# Altium PCB version_3.PcbDoc
Units mil, origin at the board's own origin, x right, y up, seen from the top; angles counter-clockwise.
Board outline 3930.36 x 3820 mil, 2 copper layers (Top Layer, Bottom Layer); 69 components, 63 nets, 309 pads, 68 vias.
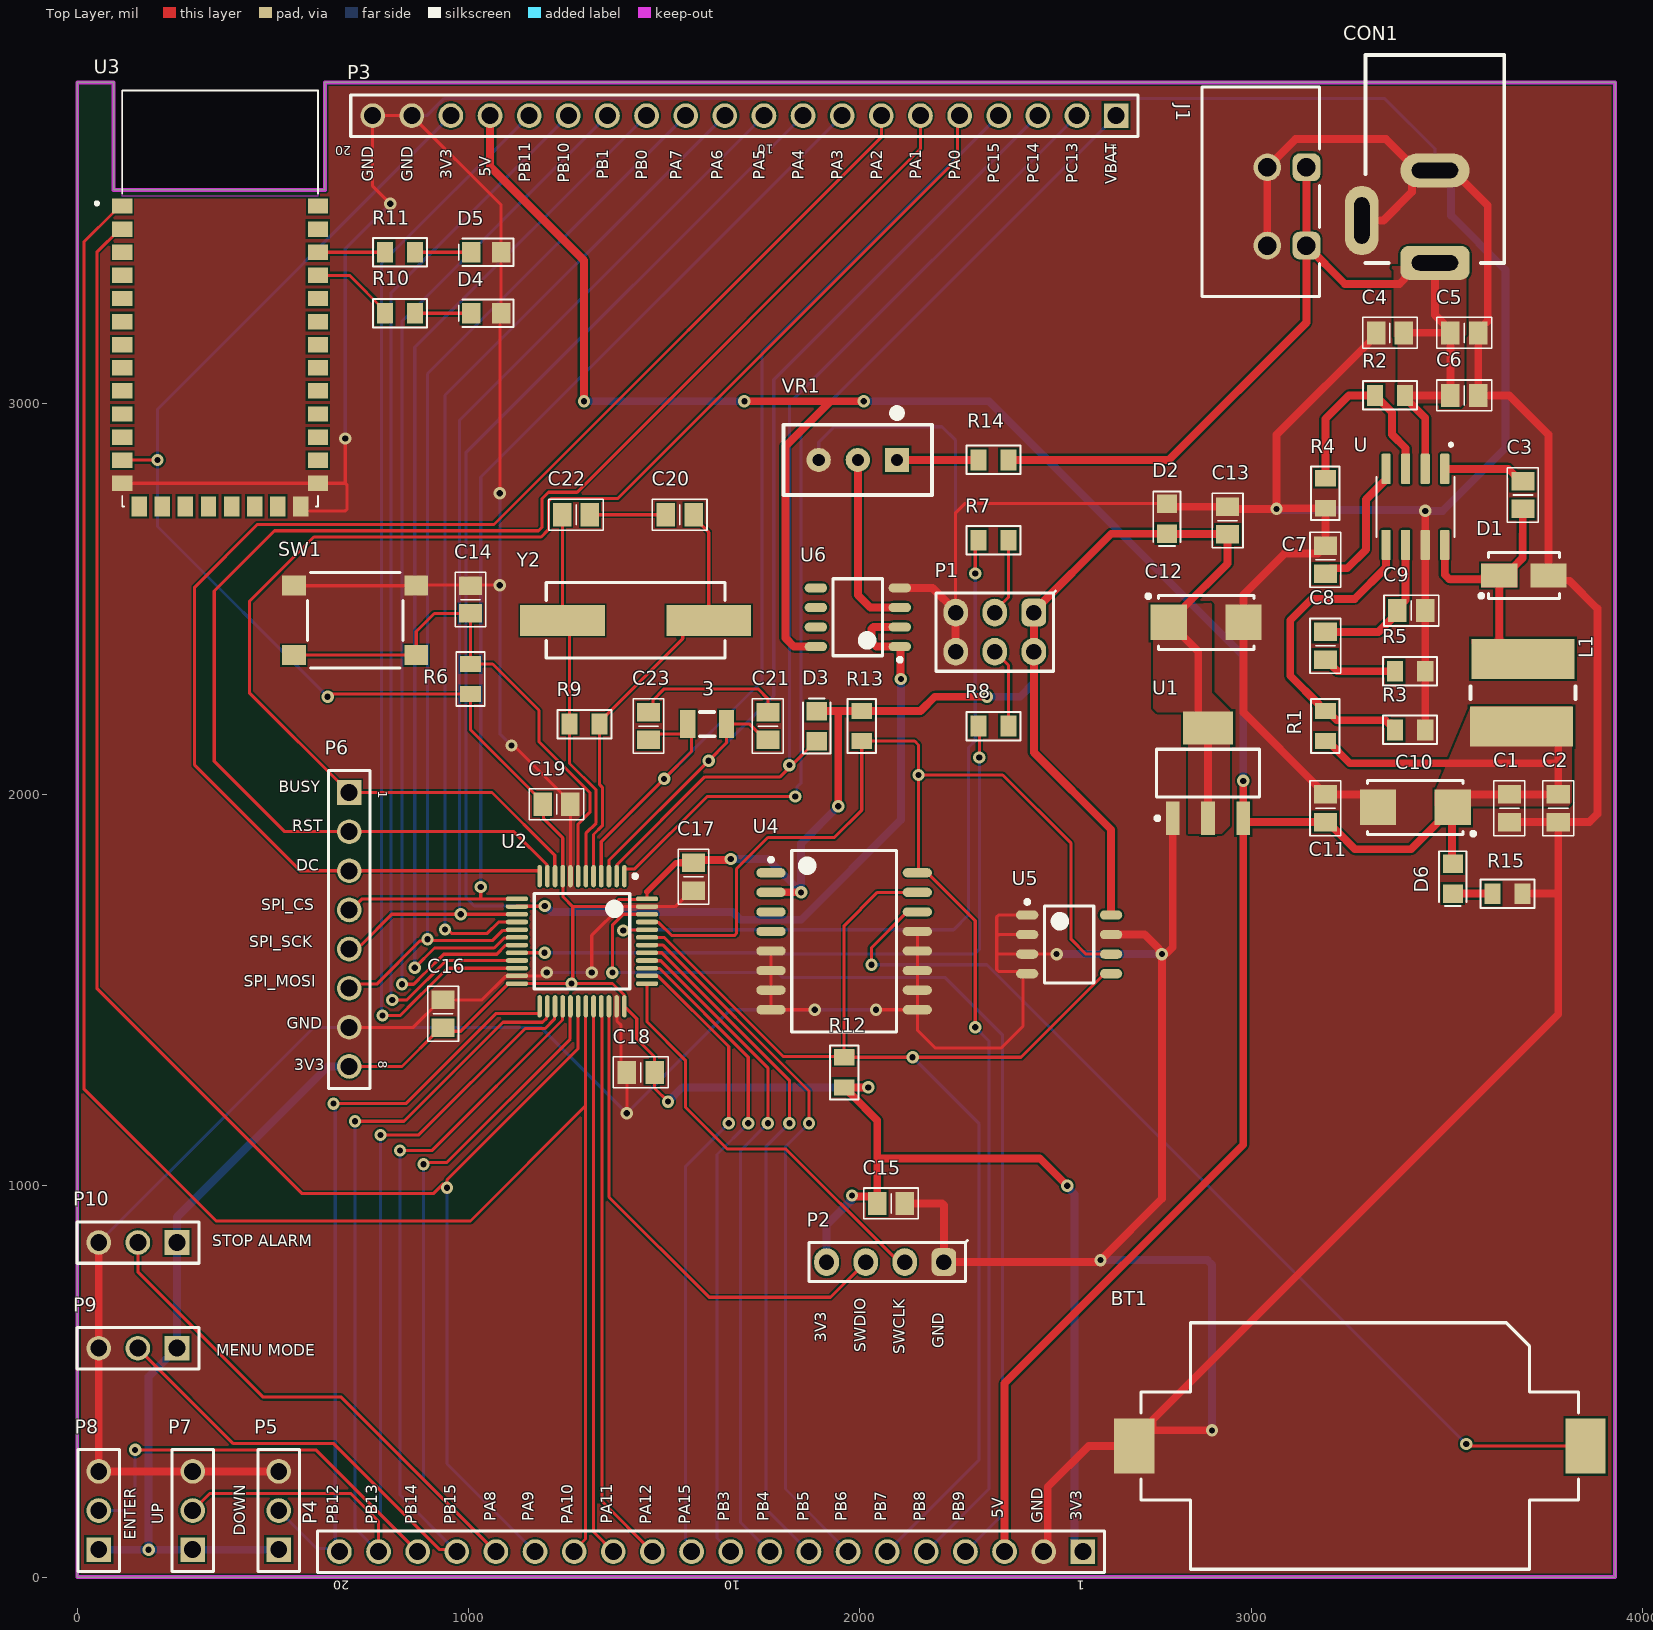
[diagram p0: Top Layer view]
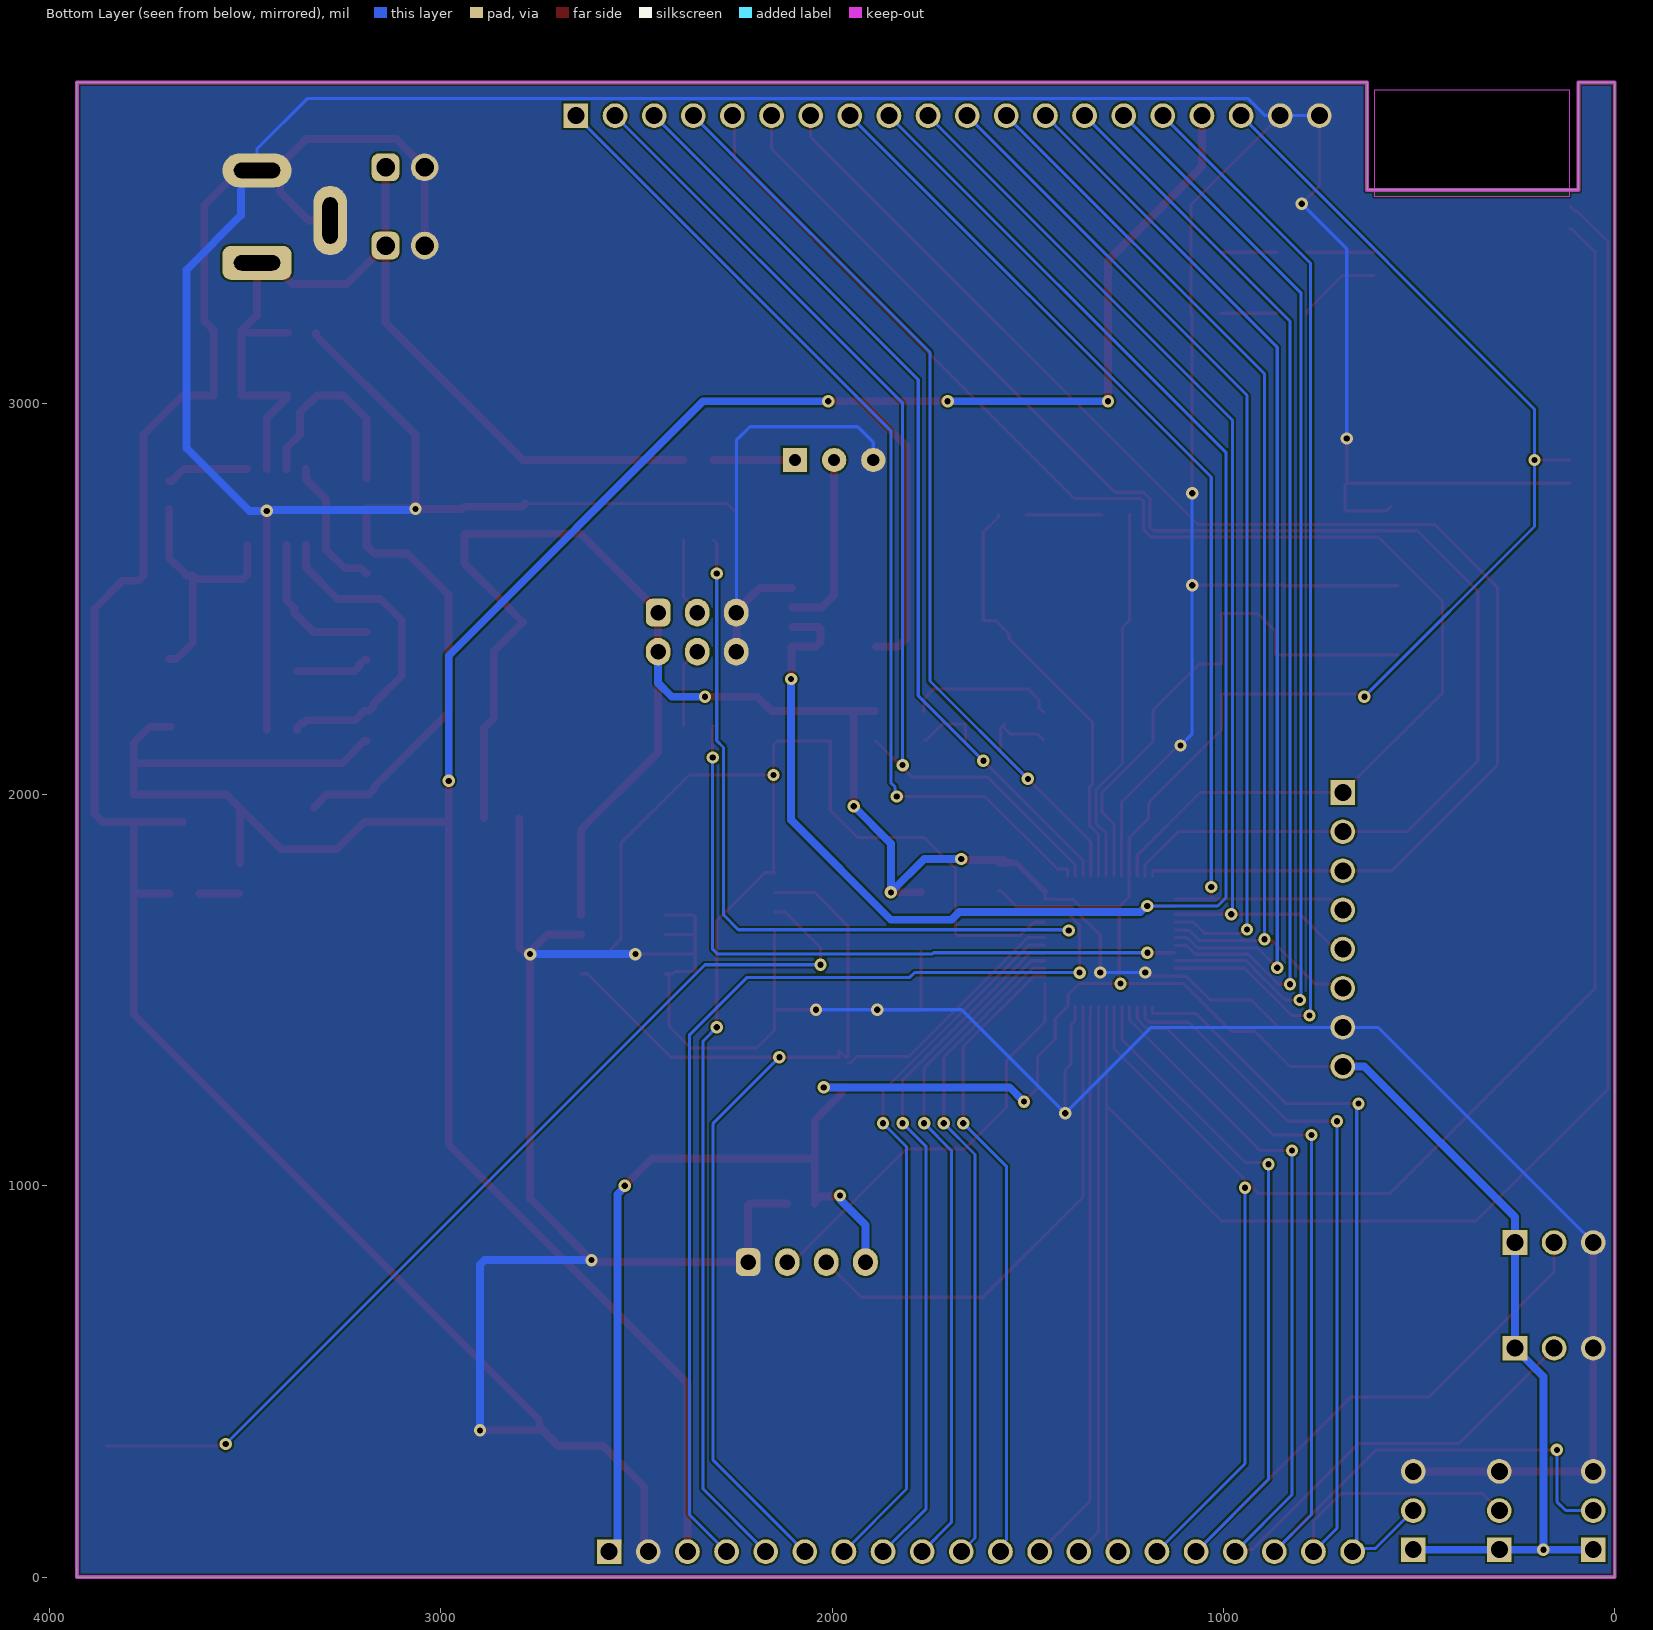
[diagram p1: Bottom Layer view, seen from below]

## Layer stack, top to bottom
Top Solder: solder mask 0.4, Solder Resist, Dk 3.5
Top Layer: signal copper 1.4
Dielectric 1: dielectric 12.6, FR-4, Dk 4.8
Bottom Layer: signal copper 1.4
Bottom Solder: solder mask 0.4, Solder Resist, Dk 3.5

## Board outline
0,0 0,3820 92.86,3820 92.86,3545 632.86,3545 632.86,3820 3930.36,3820 3930.36,0

## Design rules (kind name [scope] priority, off if disabled: settings)
Clearance [All] p1: gap=5 ignorepadtopadclearanceinfootprint=FALSE
PolygonConnect [All] p1: connectstyle=Direct reliefconductorwidth=10 reliefentries=4 polygonreliefangle="90 Angle" airgapwidth=10
RoutingVias [All] p1: holewidth=15.75 width=31.5 viastyle="Through Hole" minholewidth=15.75 minwidth=31.5 maxholewidth=15.75 maxwidth=31.5
SolderMaskExpansion [All] p1: expansion=4 istentingtop=FALSE
Width [All] p1: maxlimit=50 minlimit=8 preferedwidth=10
30 further rules are at their usual default settings.

## Classes and differential pairs
component class 08_ADC_measure: R14 U6 VR1
component class 07_E_ink_display_Button_control: P5 P6 P7 P8 P9 P10
component class 06_I2C_DS3231: BT1 R12 R13 U4 U5
component class 05_Uart_Bluetooth: D4 D5 R10 R11 U3
component class 04_MCU: 3 C14 C15 C16 C17 C18 C19 C20 C21 C22 C23 D2 D3 P1 P2 P3 P4 R6 R7 R8 R9 SW1 U2 Y2
component class 03_Power_Spply: C1 C2 C3 C4 C5 C6 C7 C8 C9 C10 C11 C12 C13 CON1 D1 D6 J1 L1 R1 R2 R3 R4 R5 R15 U U1

## Components (designator, comment, footprint, x,y, rotation, side; value= is the part's Value field where it differs from the comment)
3 "32.768kHz" XKXGI-SUA-32.768K 1610,2180 r0 top
BT1 "79527141" 79527141 3278.23,335 r0 top
C1 "47uF" "C 0805" 3660,1965 r90 top
C2 "47uF" "C 0805" 3785,1965 r90 top
C3 "0.1uF" "C 0805" 3694.52,2765.43 r90 top
C4 "10uf" "C 0805" 3355,3180 r0 top
C5 "10uf" "C 0805" 3545,3180 r180 top
C6 "0.01uF" "C 0805" 3545,3020 r180 top
C7 "0.01uF" "C 0805" 3190,2600 r270 top
C8 "1000pF" "C 0805" 3190,2380 r90 top
C9 "47pF" "C 0805" 3409.57,2470 r180 top
C10 "22uF" "C SMD TAN 2312 (C)" 3420,1966.97 r180 top
C11 "100nF" "C 0805" 3190,1965 r270 top
C12 "22uF" "C SMD TAN 2312 (C)" 2885,2440 r0 top
C13 "100nF" "C 0805" 2940,2700 r270 top
C14 "C" "C 0805" 1005,2498.15 r90 top
C15 "104" "C 0805" 2080,955 r0 top
C16 "104" "C 0805" 935,1439.57 r270 top
C17 "104" "C 0805" 1575,1790 r90 top
C18 "104" "C 0805" 1440,1290 r0 top
C19 "104" "C 0805" 1225,1975 r180 top
C20 "20p" "C 0805" 1539.57,2715 r180 top
C21 "20p" "C 0805" 1765,2175 r90 top
C22 "20p" "C 0805" 1275,2715 r0 top
C23 "20p" "C 0805" 1460,2175 r90 top
CON1 "CON DC PWR" CONN/DC/PWR/5.0MM 3470,3358.78 r270 top
D1 "SS54F" "DO-214AC (SMA)" 3697.24,2560 r180 top
D2 "Led" "Led 0805" 2785,2705 r90 top
D3 "Led" "Led 0805" 1890,2175 r270 top
D4 "Led" "Led 0805" 1045,3230 r0 top
D5 "Led" "Led 0805" 1045,3385.91 r0 top
D6 "Led" "Led 0805" 3515.47,1785 r90 top
J1 "6A, 150V" 691402910002B 3025,3540 r180 top
L1 "10uh" "Inductor SMD CDRH3D67" 3695,2260 r270 top
P1 "Header 3X2" HDR/Header/6/DL 2345,2415 r180 top
P2 "Header 4" HDR/Header/4 2065,805 r180 top
P3 "3A, 250 V (AC)" 61302011121 1705,3735 r180 top
P4 "3A, 250 V (AC)" 61302011121 1620,65 r180 top
P5 "3A, 250 V (AC)" 61300311121 515,170 r90 top
P6 "3A, 250 V (AC)" 61300811121 695,1655 r270 top
P7 "3A, 250 V (AC)" 61300311121 295,170 r90 top
P8 "3A, 250 V (AC)" 61300311121 55,170 r90 top
P9 "3A, 250 V (AC)" 61300311121 155,585 r180 top
P10 "3A, 250 V (AC)" 61300311121 155,855 r180 top
R1 "8.2k" "R 0805" 3190,2175 r270 top
R2 "100k" "R 0805" 3355,3020 r0 top
R3 "1.6k" "R 0805" 3406.61,2165 r180 top
R4 "20k" "R 0805" 3190,2770 r90 top
R5 "30k" "R 0805" 3406.61,2315 r180 top
R6 "10k" "R 0805" 1005,2295 r90 top
R7 "100k" "R 0805" 2341.61,2650 r180 top
R8 "100k" "R 0805" 2341.61,2175 r0 top
R9 "R" "R 0805" 1296.61,2180 r0 top
R10 "470" "R 0805" 825,3230 r180 top
R11 "470" "R 0805" 825,3385.91 r180 top
R12 "10k" "R 0805" 1960,1290 r90 top
R13 "4.7k" "R 0805" 2005,2175 r270 top
R14 "100k" "R 0805" 2341.61,2855 r0 top
R15 "1.6k" "R 0805" 3655,1746.61 r180 top
SW1 "430152043826" WS-TASV_L6W6H4.3_4301x20438x6 710,2445 r0 top
U "TPS54231D" SOIC127P599X175-8N 3420,2735 r270 top
U1 "AMS1117-3.3V, 1A" "AMS1117-3.3V SOT223" 2890,2054.65 r90 top
U2 "STM32F103C8T6" STM32F103C8T6 1290,1625 r270 top
U3 "HC-05" XCVR_HC-05 365,3255 r0 top
U4 "DS3231SN" DS3231SN-16SOIC 1960,1625 r0 top
U5 "AT24C512C-SSHD-T" M24M01-RMN6TP 2535,1617.03 r0 top
U6 "LM358DR" LM358DR 1995,2452.97 r180 top
VR1 "VR" "R VAR E" 2095,2855 r180 top
Y2 "8MHz" WE-XTAL_HC49/4HSMX 1427.01,2445 r0 top

## Footprints (in the part's own frame and the unit in brackets; to place one, negate y for a bottom-side part, rotate by r counter-clockwise, add the part's x,y. Pads: shape width x height; smd on the part's side, far side on the other; paste and mask are expansions set on the pad)
79527141 [mm] "Battery Holder"
  rect 2.6x3.6 smd: 1(14.65,0) 2(-14.65,0)
  silkscreen extent -14.2,-8 14.2,8, body extent -15.95,-8 15.95,8, height 5.66
61300311121 [mm] "Pin Header, pitch 2.54 mm, THT, Vertical, single row, 3p"
  rect 1.6x1.6 hole 1.1: 1(-2.54,0)
  round 1.6 hole 1.1: 2(0,0) 3(2.54,0)
  silkscreen extent -3.96,-1.35 3.96,1.35, body extent -3.81,-1.27 3.81,1.27, height 8.57
61300811121 [mm] "Pin Header, pitch 2.54 mm, THT, Vertical, single row, 8p"
  rect 1.6x1.6 hole 1.1: 1(-8.89,0)
  round 1.6 hole 1.1: 2(-6.35,0) 3(-3.81,0) 4(-1.27,0) 5(1.27,0) 6(3.81,0) 7(6.35,0) 8(8.89,0)
  silkscreen extent -10.31,-1.35 10.31,1.35, body extent -10.16,-1.27 10.16,1.27, height 8.57
61302011121 [mm] "Pin Header, pitch 2.54 mm, THT, Vertical, single row, 20p"
  rect 1.6x1.6 hole 1.1: 1(-24.13,0)
  round 1.6 hole 1.1: 2(-21.59,0) 3(-19.05,0) 4(-16.51,0) 5(-13.97,0) 6(-11.43,0) 7(-8.89,0) 8(-6.35,0) 9(-3.81,0) 10(-1.27,0) 11(1.27,0) 12(3.81,0) 13(6.35,0) 14(8.89,0) 15(11.43,0) 16(13.97,0) 17(16.51,0) 18(19.05,0) 19(21.59,0) 20(24.13,0)
  silkscreen extent -25.55,-1.35 25.55,1.35, body extent -25.4,-1.27 25.4,1.27, height 8.57
691402910002B [mm] "2.54 mm - Screwless Horizontal Entry - 02p"
  rrect50% 1.8x1.8 hole 1.2: 1(-2.96,3.48) 1(-2.96,-1.6)
  round 1.8 hole 1.2: 2(-0.42,3.48) 2(-0.42,-1.6)
  silkscreen extent -3.81,-6.8 3.81,6.8, body extent -3.81,-6.8 3.81,6.8, height 12.64
"AMS1117-3.3V SOT223" [mm] "SOT223, 4-Leads, Body 6.51x7.00mm, Pitch 2.29mm"
  rect 2.15x0.9 smd: 1(-2.93,2.29) 2(-2.93,0) 3(-2.93,-2.29)
  rect 2.15x3.25 smd: 4(2.93,0)
  silkscreen extent -3.05,-3.35 1.55,3.41, body extent -3.5,-3.35 3.5,3.35, height 1.8
"C 0805" [mm] "Chip Capacitor, 2-Leads, Body 2.0x1.3mm, IPC Medium Density"
  rect 1.2x1.5 smd: 1(-0.9,0) 2(0.9,0)
  silkscreen extent -1.78,-1 1.78,1, body extent -1,-0.64 1,0.61, height 0.6
"C SMD TAN 2312 (C)" [mm] "Molded Capacitor, 2-Leads, Body 6.0x3.2mm, IPC Medium Density"
  rect 2.35x2.3 smd: 1(-2.425,0) 2(2.425,0)
  silkscreen extent -3.88,-1.75 3.1,1.82, body extent -3.09,-1.58 3.09,1.63, height 2.68
CONN/DC/PWR/5.0MM [mm]
  rrect50% 2.2x4.5 hole 1 slot 3 at 90 deg: 1(0,0)
  oval 2.2x4.5 hole 1 slot 3 at 90 deg: 2(-6,0)
  oval 4.5x2.2 hole 1 slot 3 at 0 deg: 3(-2.75,-4.75)
  silkscreen extent -13.5,-4.5 0,4.5, body extent -13.58,-5 0.25,4.5, height 11.02
"DO-214AC (SMA)" [mm] "Molded Diode, 2-Leads, Body 4.3x2.7mm, IPC Medium Density"
  rect 2.35x1.55 smd: 1(-1.6,0) 2(1.6,0)
  silkscreen extent -2.3,-1.5 2.89,1.5, body extent -2.6,-1.3 2.6,1.3, height 2.4
DS3231SN-16SOIC [mm] "SOIC, 16-Leads, Body 11.55x7.50mm, Pitch 1.27mm, IPC Medium Density"
  oval 1.9x0.6 smd: 1(-4.75,4.445) 2(-4.75,3.175) 3(-4.75,1.905) 4(-4.75,0.635) 5(-4.75,-0.635) 6(-4.75,-1.905) 7(-4.75,-3.175) 8(-4.75,-4.445) 9(4.75,-4.445) 10(4.75,-3.175) 11(4.75,-1.905) 12(4.75,-0.635) 13(4.75,0.635) 14(4.75,1.905) 15(4.75,3.175) 16(4.75,4.445)
  silkscreen extent -4.87,-5.9 3.4,5.9, body extent -5.16,-5.9 5.16,5.9, height 2.65
HDR/Header/4 [mm]
  rrect50% 1.6x1.8 hole 1: 1(-3.81,0)
  oval 1.6x1.8 hole 1: 2(-1.27,0) 3(1.27,0) 4(3.81,0)
  silkscreen extent -5.33,-1.4 4.95,1.27, body extent -5.08,-1.27 5.08,1.27, height 8.89
HDR/Header/6/DL [mm]
  rrect50% 1.6x1.8 hole 1: 1(-2.54,-1.27)
  oval 1.6x1.8 hole 1: 2(-2.54,1.27) 3(0,-1.27) 4(0,1.27) 5(2.54,-1.27) 6(2.54,1.27)
  silkscreen extent -3.94,-2.67 3.81,2.54, body extent -3.81,-2.54 3.81,2.54, height 8.89
"Inductor SMD CDRH3D67" [mm] "Precision Wire Wound Inductor, 2-Leads, Body 10.0x8.0mm, IPC Low Density"
  rect 2.6x6.7 smd: 1(-2.2,0) 2(2.2,-0.1)
  silkscreen extent -0.4,-3.4 0.4,3.4, body extent -3.35,-3.35 3.35,3.35, height 2.9
"Led 0805" [mm] "Led SMD 0805"
  rect 1.2x1.3 smd: 1(-0.975,0) 2(0.975,0)
  silkscreen extent -1.78,-0.89 1.78,0.89, body extent -1.01,-0.64 1.01,0.61, height 1.1
LM358DR [mm] "SOIC, 8-Leads, Body 4.90x3.90mm, Pitch 1.27mm, IPC Medium Density"
  oval 1.45x0.6 smd: 1(-2.725,1.905) 2(-2.725,0.635) 3(-2.725,-0.635) 4(-2.725,-1.905) 5(2.725,-1.905) 6(2.725,-0.635) 7(2.725,0.635) 8(2.725,1.905)
  silkscreen extent -2.85,-2.5 1.6,2.88, body extent -3,-2.5 3,2.5, height 1.75
M24M01-RMN6TP [mm] "SOIC, 8-Leads, Body 4.90x3.90mm, Pitch 1.27mm, IPC Medium Density"
  oval 1.45x0.6 smd: 1(-2.725,1.905) 2(-2.725,0.635) 3(-2.725,-0.635) 4(-2.725,-1.905) 5(2.725,-1.905) 6(2.725,-0.635) 7(2.725,0.635) 8(2.725,1.905)
  silkscreen extent -2.85,-2.5 1.6,2.88, body extent -3,-2.5 3,2.5, height 1.25
"R 0805" [mm] "Chip Resistor, 2-Leads, Body 2.0x1.3mm, IPC Medium Density"
  rect 1.05x1.35 smd: 1(-0.975,0) 2(0.975,0)
  silkscreen extent -1.75,-0.92 1.75,0.92, body extent -1,-0.61 1,0.59, height 0.5
"R VAR E" [mil]
  rect 62x62 hole 31: 1(0,0)
  round 62 hole 31: 2(100,0) 3(200,0)
  silkscreen extent -90,-130 290,90, body extent -93,-97 293,97, height 459
SOIC127P599X175-8N [mm]
  rrect25% 1.97x0.6 smd: 1(-2.47,1.905) 2(-2.47,0.635) 3(-2.47,-0.635) 4(-2.47,-1.905) 5(2.47,-1.905) 6(2.47,-0.635) 7(2.47,0.635) 8(2.47,1.905)
  silkscreen extent -4.14,-2.52 1.95,2.52
STM32F103C8T6 [mm] "TSQFP, 48-Leads, Body 7.00x7.00mm, Pitch 0.50mm, IPC Medium Density"
  oval 1.45x0.3 smd: 1(-4.225,2.75) 2(-4.225,2.25) 3(-4.225,1.75) 4(-4.225,1.25) 5(-4.225,0.75) 6(-4.225,0.25) 7(-4.225,-0.25) 8(-4.225,-0.75) 9(-4.225,-1.25) 10(-4.225,-1.75) 11(-4.225,-2.25) 12(-4.225,-2.75) 25(4.225,-2.75) 26(4.225,-2.25) 27(4.225,-1.75) 28(4.225,-1.25) 29(4.225,-0.75) 30(4.225,-0.25) 31(4.225,0.25) 32(4.225,0.75) 33(4.225,1.25) 34(4.225,1.75) 35(4.225,2.25) 36(4.225,2.75)
  oval 0.3x1.45 smd: 13(-2.75,-4.225) 14(-2.25,-4.225) 15(-1.75,-4.225) 16(-1.25,-4.225) 17(-0.75,-4.225) 18(-0.25,-4.225) 19(0.25,-4.225) 20(0.75,-4.225) 21(1.25,-4.225) 22(1.75,-4.225) 23(2.25,-4.225) 24(2.75,-4.225) 37(2.75,4.225) 38(2.25,4.225) 39(1.75,4.225) 40(1.25,4.225) 41(0.75,4.225) 42(0.25,4.225) 43(-0.25,4.225) 44(-0.75,4.225) 45(-1.25,4.225) 46(-1.75,4.225) 47(-2.25,4.225) 48(-2.75,4.225)
  silkscreen extent -4.35,-3.1 3.1,3.58, body extent -4.5,-4.5 4.5,4.5, height 1.6
WE-XTAL_HC49/4HSMX [mm] "Quartz Crystal, size HC49/4HSMX, body 11.4x4.9mm"
  rect 5.5x2 smd: 1(-4.75,0) 2(4.75,0)
  silkscreen extent -5.8,-2.45 5.8,2.45, body extent -6.7,-2.45 6.7,2.45, height 4.3
WS-TASV_L6W6H4.3_4301x20438x6 [mm] "SMD Tact Switch, body 6x6mm"
  rect 1.55x1.3 smd: A1(-3.975,2.25) A2(3.975,2.25) B1(-3.975,-2.25) B2(3.975,-2.25)
  silkscreen extent -3.1,-3.1 3.1,3.1, body extent -4.5,-3.1 4.5,3.1, height 4.3
XCVR_HC-05 [mm]
  rect 1.3x1 smd: 1(-6.35,6.325) 2(-6.35,4.825) 3(-6.35,3.325) 4(-6.35,1.825) 5(-6.35,0.325) 6(-6.35,-1.175) 7(-6.35,-2.675) 8(-6.35,-4.175) 9(-6.35,-5.675) 10(-6.35,-7.175) 11(-6.35,-8.675) 12(-6.35,-10.175) 13(-6.35,-11.675) 22(6.35,-11.675) 23(6.35,-10.175) 24(6.35,-8.675) 25(6.35,-7.175) 26(6.35,-5.675) 27(6.35,-4.175) 28(6.35,-2.675) 29(6.35,-1.175) 30(6.35,0.325) 31(6.35,1.825) 32(6.35,3.325) 33(6.35,4.825) 34(6.35,6.325)
  rect 1x1.3 smd: 14(-5.25,-13.175) 15(-3.75,-13.175) 16(-2.25,-13.175) 17(-0.75,-13.175) 18(0.75,-13.175) 19(2.25,-13.175) 20(3.75,-13.175) 21(5.25,-13.175)
  Keep-Out Layer region: 6.35,6.95 -6.35,6.95 -6.35,13.85 6.35,13.85
  Keep-Out Layer region: 6.35,6.95 -6.35,6.95 -6.35,13.85 6.35,13.85
  silkscreen extent -8.1,-13.18 6.35,13.82
XKXGI-SUA-32.768K [mm]
  rect 1x1.8 smd: 1(-1.25,0) 2(1.25,0)
  silkscreen extent -0.48,-0.79 0.47,0.79, body extent -1.6,-0.75 1.6,0.75, height 0.9

## Part data
3: library part XKXGI-SUA-32.768K, "32.768kHz Surface Mount Crystal 12.5pF ±20ppm ±30ppm SMD3215-2P Crystals ROHS", Frequency Stability=+/-30ppm, Frequency Tolerance=+/-20ppm, LCSC Part #=C5213671, Load Capacitance=12.5pF, Manufacturer="YXC Crystal Oscillators", Operating Temperature Max="+ 85 C", Operating Temperature Min="- 40 C", Package / Case=SMD3215-2P, Supplier 1 Part Number=N/A, ComponentLink1Description=Datasheet, ComponentLink1URL=https://www.lcsc.com/datasheet/lcsc_datasheet_2210261730_YXC-Crystal-Oscillators-XKXGI-SUA-32-768K_C5213671.pdf, Frequency=32.768kHz, Manufacturer Part Number=XKXGI-SUA-32.768K, Mount=SMD/SMT, Packaging="Tape and Reel", Supplier 1=Mouser, Supplier 1 URL=N/A, Supplier 2=Digi-Key, Supplier 2 Part Number=N/A, Supplier 2 URL=N/A, Supplier 3=thegioiic, Supplier 3 Part Number=N/A, Supplier 3 URL=N/A
BT1: "WA-BCPH Battery Holder, SMT, battery type 2032", Manufacturer="Wurth Elektronik", Operating Temperature Max=105°C, Operating Temperature Min=-40°C, Battery Type=2032, Category="Battery Holders", ComponentLink1Description="Website Link", ComponentLink1URL=https://www.we-online.com/redexpert/article/79527141?ad, ComponentLink2Description="Datasheet Link", ComponentLink2URL=https://www.we-online.com/redexpert/spec/79527141?ad, Manufacturer Part Number=79527141, Match Code=WA-BCPH, Mount="Surface Mount", Packaging="Tape and Reel"
C1 C2 C3 C4 C5 C6 C7 C8 C9 C11 C13 C14 C15 C16 C17 C18 C19 C20 C21 C22 C23: library part "Capacitor NP", "Capacitor non-pol"
C10 C12: library part Capacitor, "Capacitor pol"
CON1: "DC input connector"
D1: library part "Diode Schottky", "Schottky Diode"
D2 D3 D4 D5 D6: "Typical LED"
J1: library part 691402910002B, "WR-TBL Series 4029 Horizontal Entry, THT, pitch 2.54mm, 2p", LCSC Part #=N/A, Manufacturer="Wurth Elektronik", Operating Temperature Max=105°C, Operating Temperature Min=-40°C, Rated Current=6A, Working Voltage=150V, Application=Screwless, Category="Terminal Blocks", ComponentLink1Description=Datasheet, ComponentLink1URL=https://www.we-online.com/redexpert/spec/691402910002B?ad, Manufacturer Part Number=691402910002B, Match Code=WR-TBL, Modularity=No, Mount="Through Hole", Number of Pins=2, Number of Rows=1, Orientation=Horizontal, Packaging=Box, Pitch=2.54mm, Supplier 1=Mouser, Supplier 1 Part Number=N/A, Supplier 1 URL=N/A, Supplier 2=Digi-Key, Supplier 2 Part Number=N/A, Supplier 2 URL=N/A, Supplier 3=thegioiic, Supplier 3 Part Number=N/A, Supplier 3 URL=https://www.thegioiic.com/kf141-2-54-2-r-terminal-block-2-tiep-diem-cam-day-ngang-2-54mm-150v-2a
L1: library part Inductor, "Inductor"
P1: "Header, 3-Pin, Dual row"
P2: "Header, 4-Pin"
P3 P4: library part 61302011121, "WR-PHD Pin Header, THT, pitch 2.54mm, Single Row, Vertical, 20p", Contact Resistance=20mOhm, LCSC Part #=N/A, Manufacturer="Wurth Elektronik", Operating Temperature Max="+ 85 C", Operating Temperature Min="- 25 C", Rated Current=3A, Supplier 1 Part Number=710-61302011121, Withstanding Voltage=500VAC, Working Voltage=250VAC, ComponentLink1Description=Datasheet, ComponentLink1URL=https://www.we-online.com/catalog/datasheet/61302011121.pdf, Gender="Pin Header", Manufacturer Part Number=61302011121, Mount=THT, Orientation=Vertical, Packaging=Bag, Pin Number=20, Pitch=2.54mm, Published Date="May 2020", Row Number=Single, Supplier 1=Mouser, Supplier 1 URL=https://www.mouser.vn/ProductDetail/Wurth-Elektronik/61302011121?qs=PhR8RmCirEbj%2FFsnpbhNaw%3D%3D, Supplier 2=Digi-Key, Supplier 2 Part Number=N/A, Supplier 2 URL=N/A, Supplier 3=thegioiic, Supplier 3 Part Number=N/A, Supplier 3 URL=N/A
P5 P7 P8 P9 P10: library part 61300311121, "WR-PHD Pin Header, THT, pitch 2.54mm, Single Row, Vertical, 3p", Contact Resistance=20mOhm, LCSC Part #=C2937625, Manufacturer="Wurth Elektronik", Operating Temperature Max="+ 85 C", Operating Temperature Min="- 25 C", Rated Current=3A, Supplier 1 Part Number=710-61300311121, Supplier 2 Part Number=N/A, Withstanding Voltage=500VAC, Working Voltage=250VAC, ComponentLink1Description=Datasheet, ComponentLink1URL=https://www.we-online.com/catalog/datasheet/61300311121.pdf, Gender="Pin Header", Manufacturer Part Number=61300311121, Mount=THT, Orientation=Vertical, Packaging=Bag, Pin Number=3, Pitch=2.54mm, Published Date="May 2020", Row Number=Single, Supplier 1=Mouser, Supplier 1 URL=https://www.mouser.vn/ProductDetail/Wurth-Elektronik/61300311121?qs=PhR8RmCirEYxRWFJzNKsUw%3D%3D, Supplier 2=Digi-Key, Supplier 2 URL=N/A, Supplier 3=thegioiic, Supplier 3 Part Number=N/A, Supplier 3 URL=N/A
P6: library part 61300811121, "WR-PHD Pin Header, THT, pitch 2.54mm, Single Row, Vertical, 8p", Contact Resistance=20mOhm, LCSC Part #=N/A, Manufacturer="Wurth Elektronik", Operating Temperature Max="+ 85 C", Operating Temperature Min="- 25 C", Rated Current=3A, Supplier 1 Part Number=710-61300811121, Withstanding Voltage=500VAC, Working Voltage=250VAC, ComponentLink1Description=Datasheet, ComponentLink1URL=https://www.we-online.com/catalog/datasheet/61300811121.pdf, Gender="Pin Header", Manufacturer Part Number=61300811121, Mount=THT, Orientation=Vertical, Packaging=Bag, Pin Number=8, Pitch=2.54mm, Published Date="May 2020", Row Number=Single, Supplier 1=Mouser, Supplier 1 URL=https://www.mouser.vn/ProductDetail/Wurth-Elektronik/61300811121?qs=PhR8RmCirEZRdx%252BVlEmRRA%3D%3D, Supplier 2=Digi-Key, Supplier 2 Part Number=N/A, Supplier 2 URL=N/A, Supplier 3=thegioiic, Supplier 3 Part Number=N/A, Supplier 3 URL=N/A
R1 R2 R3 R4 R5 R6 R7 R8 R9 R10 R11 R12 R13 R14 R15: library part Resistor, "Resistor"
SW1: "WS-TASV SMT Tact Switch, L6 x W6 x H4.3mm, 260g, SPST-NO, 12V, 50mA", LCSC Part #=N/A, Manufacturer="Wurth Elektronik", Operating Temperature Max=85°C, Operating Temperature Min=-40°C, Package / Case=0805, Rated Current=50mA, Rated Voltage=12VDC, Supplier 1 Part Number=710-430152043826, Supplier 2 Part Number=732-6991-2-ND, Supplier 3 Part Number=OEM, Category="Tact Switches", Circuit=SPST-NO, ComponentLink1Description=Datasheet, ComponentLink1URL=https://www.we-online.com/redexpert/spec/430152043826?ad, Contact Material="Stainless Steel", Height=4.3mm, Length=6mm, Manufacturer Part Number=430152043826, Match Code=WS-TASV, Mount="Surface Mount", Operation Force=260g, Packaging="Tape and Reel", Supplier 1=Mouser, Supplier 1 URL=https://www.mouser.vn/ProductDetail/Wurth-Elektronik/430152043826?qs=wr8lucFkNMUjBcFj1giTsA%3D%3D, Supplier 2=Digi-Key, Supplier 2 URL=https://www.digikey.com/en/products/detail/w%C3%BCrth-elektronik/430152043826/5208994, Supplier 3=thegioiic, Supplier 3 URL=https://www.thegioiic.com/nut-nhan-6x6mm-cao-4-3mm-4-chan-smd, Terminal Material="Copper Alloy", Terminal Plating=Silver, Washable=No, Width=6mm
U: "å…·æœ‰Eco-modeï¼†tradeçš„3.5è‡³28Vè¾“å…¥ï¼Œ2Aï¼Œ570kHzé™åŽ‹è½¬æ¢å™¨ï¼›8-SOIC -40è‡³150", PACKAGE="SOIC-8 Texas Instruments", Availability=Unavailable, DigiKey-Purchase-URL=https://snapeda.com/shop?store=DigiKey&id=456068, MF="Texas Instruments", MP=TPS54231D, Price=None, SnapEDA_Link=https://www.snapeda.com/parts/TPS54231D/Texas%20Instruments/view-part/456068/?ref=snap, Texas_Instruments-Purchase-URL=https://snapeda.com/shop?store=Texas+Instruments&id=456068
U1: library part AMS1117-3.3V, "1A 60dB@(120Hz) Fixed 3.3V Positive electrode 12V SOT-223 Linear Voltage Regulators (LDO) ROHS", Current Input Maximum=N/A, Current Output Maximum=1A, LCSC Part #=C347222, Manufacturer=AMS, Operating Temperature Max="+ 85 C", Operating Temperature Min="- 40 C", Voltage Input Maximum=15V, Voltage Output=3.3V, ComponentLink1Description=Datasheet, ComponentLink1URL=http://www.advanced-monolithic.com/pdf/ds1117.pdf, Manufacturer Part Number=N/A, Mount=SMD/SMT, Packaging="Tape and Reel", Pad Count=4, Supplier 1=Mouser, Supplier 1 Part Number=N/A, Supplier 1 URL=N/A, Supplier 2=Digi-Key, Supplier 2 Part Number=N/A, Supplier 2 URL=N/A, Supplier 3=thegioiic, Supplier 3 Part Number=N/A, Supplier 3 URL=https://www.thegioiic.com/ams1117-3-3v-ic-on-ap-3-3v-1a-sot-223
U2: "ARM Microcontrollers - MCU 32BIT Cortex M3 64KB 20KB RAM 2X12 ADC", LCSC Part #=C8734, Manufacturer=STMicroelectronics, Manufacturer Part Number=STM32F103C8T6TR, Operating Temperature Max="+ 85 C", Operating Temperature Min="- 40 C", Package / Case=LQFP48, Supplier 1 Part Number=511-STM32F103C8T6, Supplier 2 Part Number=497-17666-2-ND, Supply Voltage - Max="3.6 V", Supply Voltage - Min="2 V", ComponentLink1Description=Datasheet, ComponentLink1URL=https://www.mouser.com/datasheet/2/389/stm32f103c8-1851025.pdf, Mount=SMD/SMT, Packaging="Tape and Reel", Pad Count=48, Part Number=STM32F103C8T6, Supplier 1=Mouser, Supplier 1 URL=https://www.mouser.com/ProductDetail/STMicroelectronics/STM32F103C8T6?qs=bhCVus9SdFtq6kqxsU5%2FDA%3D%3D, Supplier 2=Digi-Key, Supplier 2 URL=https://www.digikey.com/en/products/detail/stmicroelectronics/stm32f103c8t6tr/2122442, Supplier 3=thegioiic, Supplier 3 Part Number=STM32F103C8T6, Supplier 3 URL=https://www.thegioiic.com/stm32f103c8t6-32-bit-arm-cortex-m3-microcontroller-72mhz-64kb-flash-48-lqfp
U3: "Bluetooth to Serial Port Module", PACKAGE=None, Availability=Unavailable, MP=HC-05, Price=None
U4: library part DS3231SN-16SOIC, "IC RTC CLK/CALENDAR I2C 16SOIC", LCSC Part #=N/A, Manufacturer="Analog Devices Inc./Maxim Integrated", Operating Supply Current="110 - 170 (µA)", Operating Temperature Max="+ 85 C", Operating Temperature Min="- 40 C", Package / Case=SOIC-16, Supplier 1 Part Number=700-DS3231SN-, Supplier 2 Part Number=DS3231SN#-ND, Supply Voltage - Max="5.5 V", Supply Voltage - Min="2.3 V", ComponentLink1Description=Datasheet, ComponentLink1URL=https://www.analog.com/media/en/technical-documentation/data-sheets/DS3231.pdf, Manufacturer Part Number=DS3231SN, Mount=SMD/SMT, Packaging="Tape and Reel", RTC Bus Interface="I2C, Serial", RTC Memory Size=N/A, Supplier 1=Mouser, Supplier 1 URL=https://www.mouser.com/ProductDetail/Analog-Devices-Maxim-Integrated/DS3231SN?qs=ffX8NcjNb2RmKAb9wAk9Ug%3D%3D, Supplier 2=Digi-Key, Supplier 2 URL=https://www.digikey.com/en/products/detail/analog-devices-inc-maxim-integrated/DS3231SN/1197576, Supplier 3=thegioiic, Supplier 3 Part Number=N/A, Supplier 3 URL=https://www.thegioiic.com/ds3231sn-ic-rtc-clock-calendar-16-soic, Time Format="HH:MM:SS (12 hr, 24 hr)"
U5: "EEPROM SERIAL EEPROM 512K (64K X 8) 2WIRE 2.5V", LCSC Part #=C12371, Manufacturer=Microchip, Maximum Clock Frequency="1 MHz", Operating Temperature Max="+ 85 C", Operating Temperature Min="- 40 C", Package / Case=SOIC-8, Supplier 1 Part Number=556-AT24C512C-SSHD-T, Supplier 2 Part Number=AT24C512C-SSHD-TTR-ND, Supply Voltage - Max="5.5 V", Supply Voltage - Min="2.5 V", ComponentLink1Description=Datasheet, ComponentLink1URL=https://www.mouser.vn/datasheet/2/268/AT24C512C_I_c2_b2C_Compatible__Two_Wire__Serial_EE-2306430.pdf, Interface Type="2-Wire, I2C", Manufacturer Part Number=AT24C512C-SSHD-T, Memory Size="512 kbit", Mount=SMD/SMT, Packaging="Tape and Reel", Supplier 1=Mouser, Supplier 1 URL=https://www.mouser.vn/ProductDetail/Microchip-Technology/AT24C512C-SSHD-T?qs=Oaf4mloV4cM7Q6xetGfOtg%3D%3D, Supplier 2=Digi-Key, Supplier 2 URL=https://www.digikey.com/en/products/detail/microchip-technology/at24c512c-sshd-t/3046245, Supplier 3=thegioiic, Supplier 3 Part Number=AT24C512C-SSHD-T, Supplier 3 URL=https://www.thegioiic.com/at24c512c-sshd-t-ic-eeprom-512kbit-8-soic
U6: "Operational Amplifiers - Op Amps Dual Op Amp", Active Read Current - Max=Active, Dual Supply Voltage="+/- 3 V, +/- 5 V, +/- 9 V", Ib - Input Bias Current="250 nA", LCSC Part #=C5423, Manufacturer="Texas Instruments", Operating Supply Current="350 uA", Operating Temperature Max="+ 85 C", Operating Temperature Min="- 40 C", Output Current per Channel="20 mA", Package / Case=SOIC-8, Supplier 1 Part Number=595-LM358DR, Supplier 2 Part Number=N/A, Supply Voltage - Max="32 V", Supply Voltage - Min="3 V", Voltage Gain dB="100 dB", Vos - Input Offset Voltage="7 mV", CMRR - Common Mode Rejection Ratio="80 dB", ComponentLink1Description=Datasheet, ComponentLink1URL=https://www.ti.com/general/docs/suppproductinfo.tsp?distId=26&gotoUrl=https://www.ti.com/lit/gpn/lm358, GBP - Gain Bandwidth Product="700 kHz", Manufacturer Part Number=LM358DR, Mount=SMD/SMT, Number of Channels="2 Channel", Packaging="Tape and Reel", SR - Slew Rate="300 mV/us", Supplier 1=Mouser, Supplier 1 URL=https://www.mouser.com/ProductDetail/Texas-Instruments/LM358DR?qs=Zu35EjizYSSY6pJ37yjmHA%3D%3D, Supplier 2=Digi-Key, Supplier 2 URL=N/A, Supplier 3=thegioiic, Supplier 3 Part Number=N/A, Supplier 3 URL=N/A
VR1: library part "Resistor Variable", "Resistor Variable"
Y2: library part 071105086016, "WE-XTAL Quartz Crystal, SMT, HC49/4HSMX, 8MHz, +/-30ppm", Frequency Stability=+/-50ppm, Frequency Tolerance=+/-30ppm, Load Capacitance=16pF, Manufacturer="Wurth Elektronik", Manufacturer Part Number=830003151, Operating Temperature Max="+ 60 C", Operating Temperature Min="- 10 C", Package / Case=HC49/4HSMX, Supplier 1 Part Number=710-830003151, Supplier 2 Part Number=732-830003151TR-ND, Supplier 3 Part Number=N/A, ComponentLink1Description=Datasheet, ComponentLink1URL=https://katalog.we-online.com/pbs/datasheet/830003151.pdf, Frequency=8MHz, Mount=SMD/SMT, Packaging="Tape and Reel", Supplier 1=Mouser, Supplier 1 URL=https://www.mouser.com/ProductDetail/Wurth-Elektronik/830003151?qs=2WXlatMagcHisY7XHApyYg%3D%3D, Supplier 2=Digi-Key, Supplier 2 URL=https://www.digikey.com/en/products/detail/w%C3%BCrth-elektronik/830003151/13979296, Supplier 3=thegioiic, Supplier 3 URL=https://www.thegioiic.com/thach-anh-8mhz-2-chan-smd-hc49-s

## Via types
v1: diameter 31.5, hole 15.75, Top Layer to Bottom Layer, tented both sides, 68 vias

## Nets (pads, with @x,y where several pads share a name; then routed paths per layer and width w, separated by ;. In a path a pad name is that pad's centre, name@x,y a point inside that pad or via, vN(x,y) a via of type N, cw(c..) or ccw(c..) an arc to the next point about the centre after c; other vN are vias at no path point)
5V: C1.2 C2.2 C10.1 C11.2 D6.2 L1.2 P3.17 P4.3 R1.2 U1.3 U6.8 | length 7951.2
  Top Layer w8: D6.2@3513.86,1825 D6.2 ; C10.1@3513.86,1965.35 C10.1
  Top Layer w20: P3.17 1055,3605 1295,3365 v1(1295,3005) ; v1(1705,3005) v1(2010,3005) ; U6.8 1832.03,2377.97 1810,2400 1810,2890 1923.06,3003.06 ; P4.3 2370,495 2980.16,1105.16 U1.3 v1(2980.16,2034.84) ; U1.3@2987.87,1929.57 C11.2 3195.91,1929.57 3265.47,1860 3408.5,1860 3513.86,1965.35 D6.2@3513.86,1825 ; R1.2 3195.91,2136.61 3252.52,2080 3785,2080 ; C10.1 3548.94,2000.43 C1.2 C2.2 3785,2080 ; L1.2 3743.82,2173.39 3785,2132.2 3785,2080
  Bottom Layer w20: v1(1295,3005) v1(1705,3005) ; v1(2010,3005) 2330,3005 2980.16,2354.84 v1(2980.16,2034.84)
BOOT0: R7.2 U2.44 | length 1928.8
  Top Layer w8: v1(1395.47,1652.25) 1397.02,1653.8 1455.61,1653.8 U2.44 ; v1(2295,2565) 2295,2641.77 R7.2
  Bottom Layer w8: v1(1395.47,1652.25) 1397.75,1654.53 2239.84,1654.53 2277.72,1692.41 2277.72,2120.07 2295,2137.34 v1(2295,2565)
BOOT1: R8.1 U2.20 | length 1759.2
  Top Layer w8: U2.20 v1(1194.53,1595.47) ; R8.1 2305.47,2172.76 v1(2305.47,2094.57)
  Bottom Layer w8: v1(1194.53,1595.47) 1740.93,1595.47 1743.65,1592.75 2293.69,1592.75 2305.47,1604.53 v1(2305.47,2094.57)
GND: BT1.2 C1.1 C2.1 C4.1 C5.1 C6.1 C7.1 C9.1 C10.2 C11.1 C12.2 C13.1 C14.2 C15.2 C16.1 C17.1 C18.1 C19.1 CON1.2 CON1.3 D1.1 D2.2 D4.2 D5.2 J1.2 P1.5 P1.6 P2.1 P3.19 P3.20 P4.2 P5.3 P6.7 P7.3 P8.3 P9.3 P10.3 R3.1 R4.1 R5.1 R15.1 SW1.A1 SW1.A2 U1.1 U2.8 U2.23 U2.35 U2.47 U3.13 U3.21 U3.22 U4.5 U4.6 U4.7 U4.8 U4.9 U4.10 U4.11 U4.12 U4.13 U5.1 U5.2 U5.3 U5.4 U5.7 U6.4 U.7 VR1.3 | length 28647.1
  Top Layer w8: U3.13 U3.22 684.96,2795.35 ; SW1.A1 845,2533.58 846.42,2535 v1(1080,2535) ; U3.21 582.99,2725 684.96,2725 689.65,2729.69 689.65,2790.67 684.96,2795.35 ; v1(684.96,2909.96) 684.96,2795.35 ; P6.7 859.09,1405 929.09,1475 C16.1 1033.97,1475 1093.61,1534.64 1096.55,1534.64 1097.6,1535.69 1122.93,1535.69 U2.23 1184.85,1536.42 1193.64,1545.21 v1(1200,1545.21) ; v1(800,3510) 755,3555 P3.20 P3.19 1083.39,3506.61 D5.2 D4.2 1080,3226.61 v1(1080,2770) ; v1(1110,2125.43) 1115.91,2125.43 1260.43,1980.91 C19.1 1260.47,1974.96 U2.8 ; v1(1315,1545) 1315,1640 1388.58,1713.58 U2.47 1528.11,1713.58 1569.09,1754.57 C17.1 ; U2.35 1379.31,1457.93 1379.31,1420.69 1390,1410 1390,1310.47 1404.57,1295.91 C18.1 v1(1404.57,1185.43) ; U4.5 U4.6 U4.7 U4.8 v1(1885,1450) ; v1(2041.36,1450) U4.9 ; U4.13 U4.12 U4.11 U4.10 U4.9 ; P1.5 2245,2468.94 2245,2720 2268.39,2743.39 D2.2 ; U5.2 2354.69,1642.03 2350,1637.34 ; U5.1 2354.69,1692.03 2350,1687.34 2350,1637.34 ; v1(2502.97,1592.03) U5.3 2350,1592.03 ; U4.9 2147.01,1397.99 2192.75,1352.25 2361.25,1352.25 2417,1408 2417,1534.81 2424.21,1542.03 U5.4 2406.76,1542.03 2401.07,1547.72 2354.69,1547.72 2350,1552.4 2350,1592.03 ; 2350,1592.03 2350,1637.34
  Top Layer w20: P8.3 P10.3 ; P8.3@70,270 P7.3 P5.3 ; U6.4 2185.96,2527.97 P1.5@2245,2468.94 ; C15.2 2210.31,955 2215,950.31 P2.1 2610,805 v1(2615,810) 2772.03,967.03 v1(2772.03,1592.03) ; P1.6 P1.5 ; P4.2 2480.52,75.52 2480.52,230.52 2585,335 BT1.2 ; U5.7 2727.97,1642.03 2765,1605 2765,1602.17 2772.03,1595.14 v1(2772.03,1592.03) ; D2.2 2792.95,2735.43 C13.1 2945.43,2730 v1(3065,2730) v1@3065,2731.61 ; U1.1 2799.84,1609.49 2784.58,1594.23 2774.23,1594.23 v1(2772.03,1592.03) ; v1(2900,375) 2741.46,375 BT1.2 ; J1.2@3041.54,3403 3041.54,3603 3041.54,3606.54 3045.09,3606.54 3113.54,3675 3344.72,3675 3424.72,3595 CON1.2@3447.26,3595 ; CON1.3 3338.3,3467.05 3410.94,3539.69 3410.94,3558.68 CON1.2@3447.26,3595 ; C4.1 3319.57,3174.09 3065,2919.53 v1@3065,2731.61 ; C10.2 3291.06,2000.43 C11.1 3184.09,2000.43 3170.47,2014.06 3170.47,2019.96 2980.47,2209.96 C12.2 2980.47,2510.47 3085.81,2615.81 3170.38,2615.81 C7.1 R4.1 v1@3065,2731.61 ; R3.1 R5.1 C9.1 v1(3445,2725) ; C1.1 C2.1 ; R15.1 3783.39,1746.61 3785,1745 ; BT1.2 2701.46,337.82 2748.64,385 2748.64,401.87 3785,1438.23 3785,1745 ; CON1.2@3447.26,3595 CON1.2 3515.28,3595 3605,3505.28 3605,3210.21 3600.31,3205.53 3600.06,3205.53 3580.43,3185.91 C5.1 C6.1 3660,3020 3760.23,2919.77 D1.1 3774.04,2546.19 3813.81,2546.19 3885,2475 3885,1950 3864.57,1929.57 C2.1 ; 3785,1745 C2.1
  Bottom Layer w8: P10.3 605,1405 P6.7 1185,1405 v1(1404.57,1185.43) 1669.13,1450 v1(1885,1450) v1(2041.36,1450) ; v1(684.96,2909.96) 684.96,3394.96 v1(800,3510) ; P3.20 P3.19 893.49,3735 936.98,3778.5 3341.81,3778.5 3470,3650.31 CON1.2 ; v1(1080,2770) v1(1080,2535) 1080,2155.43 v1(1110,2125.43) ; v1(1200,1545.21) 1200.1,1545.1 1314.9,1545.1 v1(1315,1545) ; VR1.3 1895,2900 1935,2940 2210,2940 2245,2905 P1.5
  Bottom Layer w20: v1(2502.97,1592.03) v1(2772.03,1592.03) ; v1(2615,810) 2888.28,810 2900,798.28 v1(2900,375) ; v1(3065,2730) 3067.5,2727.5 3442.5,2727.5 v1(3445,2725) 3490,2725 3650,2885 3650,3341.39 3511.28,3480.11 3511.28,3558.68 3474.96,3595 CON1.2
NetBT1_1: BT1.1 U4.14 | length 2536
  Top Layer w8: v1(2030,1565) 2030,1608.58 2121.42,1700 U4.14 ; v1(3550,340.16) 3550,335 BT1.1
  Bottom Layer w8: v1(2030,1565) 2325.16,1565 v1(3550,340.16)
NetC3_1: C3.1 D1.2 L1.1 U.8 | length 678.5
  Top Layer w20: U.8 3495,2561.72 3506.72,2550 3624.25,2550 D1.2 ; C3.1 3694.52,2604.52 3650,2560 D1.2 ; L1.1 3675.43,2346.61 3634.25,2387.8 D1.2
NetC3_2: C3.2 U.1 | length 212.5
  Top Layer w20: U.1 3657.23,2832.24 3688.61,2800.87 C3.2
NetC7_2: C7.2 U.4 | length 356.6
  Top Layer w20: C7.2 3203.62,2578.19 3245.84,2578.19 3293.5,2625.85 3293.5,2753.78 3345,2805.28 U.4
NetC8_1: C8.1 R5.2 | length 193
  Top Layer w20: C8.1 3195.91,2344.57 3209.53,2330.94 3209.53,2326.72 3221.24,2315 R5.2
NetC8_2: C8.2 C9.2 U.6 | length 386.6
  Top Layer w20: C8.2 3325.47,2415.43 3374.13,2464.09 C9.2 3374.13,2475.91 3395,2496.77 U.6
NetC20_2: C20.2 C22.2 | length 194.1
  Top Layer w8: C22.2@1310.43,2715.43 C22.2 C20.2
NetC21_2: C21.2 C23.2 | length 386.1
  Top Layer w8: C23.2 1471.37,2221.8 1471.37,2241.37 1500,2270 1740,2270 1765,2245 C21.2
NetD4_1: D4.1 R10.1 | length 143.2
  Top Layer w8: R10.1 D4.1
NetD5_1: D5.1 R11.1 | length 143.2
  Top Layer w8: R11.1 D5.1
NetD6_1: D6.1 R15.2 | length 101.1
  Top Layer w20: D6.1 R15.2
NetP1_3: P1.3 R7.1 | length 199.5
  Top Layer w8: P1.3 2345,2468.94 2380,2503.94 R7.1
NetP1_4: P1.4 R8.2 | length 204.5
  Top Layer w8: P1.4 2380,2330 R8.2
NetR1_1: R1.1 R3.2 U.5 | length 832.8
  Top Layer w20: U.5 3345,2580 3265,2500 3155,2500 3100,2445 3100,2303.39 3173.43,2229.96 3173.43,2224.06 3184.09,2213.39 R1.1 3195.91,2213.39 3219.29,2190 3343.23,2190 3351.65,2181.57 3357.56,2181.57 3368.23,2170.91 R3.2
NetR2_1: R2.1 R4.2 U.3 | length 523.3
  Top Layer w20: R4.2 3190,2960 3250,3020 R2.1 3360,2976.61 3360,2920 3395,2885 U.3
NetR10_2: R10.2 U3.31 | length 215.2
  Top Layer w8: U3.31 695.67,3326.85 786.61,3235.91 R10.2
NetR11_2: R11.2 U3.32 | length 171.6
  Top Layer w8: U3.32 R11.2
NetR14_1: R14.1 VR1.1 | length 208.2
  Top Layer w20: VR1.1 R14.1
NetU6_3: U6.3 VR1.2 | length 465.5
  Top Layer w20: VR1.2 1995,2510 2027.03,2477.97 U6.3
OSCIN: C20.1 R9.2 U2.5 Y2.2 | length 1085.9
  Top Layer w8: U2.5 1319.53,1897.66 1342,1920.13 1342,2018.26 1335,2025.26 R9.2 1335,2185.91 1547.41,2398.32 1547.41,2409.63 1582.78,2445 Y2.2 1614.02,2670.08 1575,2709.09 C20.1
OSCOUT: C22.1 R9.1 U2.6 Y2.1 | length 970.3
  Top Layer w8: C22.1 1240,2714.57 Y2.1 1258.23,2426.77 R9.1 1258.23,2079.4 1326,2011.63 1326,1926.76 1299.84,1900.6 U2.6
PA0: P3.5 P6.1 U2.10 | length 3672.9
  Top Layer w8: U2.10 1220.37,1792.07 1220.37,1844.63 1060,2005 P6.1 440,2260 440,2493.15 604.85,2658 1185.63,2658 1203.94,2676.32 1203.94,2749.5 1210.97,2756.53 1381.53,2756.53 2249.84,3624.84 2249.84,3729.84 P3.5
PA1: P3.6 P6.2 U2.11 | length 3825.5
  Top Layer w8: U2.11 1200.69,1792.07 1200.69,1820.34 1116.03,1905 P6.2 530,1905 350,2085 350,2520 504,2674 1179,2674 1187.94,2682.94 1187.94,2756.13 1204.35,2772.53 1277.53,2772.53 2155,3650 P3.6
PA2: P3.7 P6.3 U2.12 | length 3747.5
  Top Layer w8: U2.12 1181.73,1803.24 1179.97,1805 P6.3 570,1805 300,2075 300,2530 460,2690 1065,2690 2055,3680 P3.7
PA3: P3.8 P6.4 U2.13 | length 2824.7
  Top Layer w8: P6.4 699.98,1705 728.24,1733.27 1031.35,1733.27 ; v1(1031.35,1763.65) 1031.35,1733.27 ; U2.13 1031.35,1733.27
  Bottom Layer w8: v1(1031.35,1763.65) 1031.35,2811.35 P3.8
PA4: P3.9 U2.14 U6.1 U6.2 | length 4296.8
  Top Layer w8: U2.14 1124.37,1714.29 1194.29,1714.29 v1(1195,1715)
  Top Layer w20: U6.2 2034.69,2427.97 2030,2423.29 2030,2390 2042.03,2377.97 U6.1 2103.64,2376.61 2103.64,2296.36 v1(2105,2295)
  Bottom Layer w8: v1(1195,1715) 1015,1715 993.31,1736.69 993.31,2873.31 P3.9
  Bottom Layer w20: v1(1195,1715) 1196.98,1715 1212.46,1699.52 1675.48,1699.52 1695,1680 1850,1680 2105,1935 v1(2105,2295)
PA5: P3.10 P6.5 U2.15 | length 2829.8
  Top Layer w8: P6.5 705.52,1615.52 725.52,1615.52 803.9,1693.9 v1(980,1693.9) U2.15
  Bottom Layer w8: v1(980,1693.9) 977.31,1696.58 977.31,2957.31 P3.10
PA6: P3.11 U2.16 | length 2576.1
  Top Layer w8: v1(940,1655) 946.36,1655 956.36,1645 1048,1645 1077.21,1674.21 U2.16
  Bottom Layer w8: v1(940,1655) 940,3020 P3.11
PA7: P3.12 P6.6 U2.17 | length 2872.1
  Top Layer w8: P6.6 705.52,1515.52 765.52,1515.52 875.88,1625.88 890.88,1625.88 896,1631 899.75,1627.25 1062.23,1627.25 1087.72,1652.75 1096.55,1652.75 1097.6,1653.8 1122.93,1653.8 U2.17
  Bottom Layer w8: v1(895,1630) 895,3075 P3.12
PA8: P4.16 P10.2 U2.29 | length 2944.2
  Top Layer w8: P10.2 155,780 475,460 675,460 P4.16 ; v1(885,1055) 889.5,1059.5 944.5,1059.5 1259.74,1374.74 1259.74,1457.93 U2.29
  Bottom Layer w8: v1(885,1055) 885,250 P4.16
PA9: P4.15 U2.30 U3.2 | length 4708.8
  Top Layer w8: U3.2 109.09,3444.96 50,3385.87 50,1505 575,980 910,980 v1@935,1005 ; v1(945,995) 945,1015 1279.43,1349.43 1279.43,1457.93 U2.30
  Bottom Layer w8: v1(945,995) 945,290 P4.15
PA10: P4.14 U2.31 U3.1 | length 5250
  Top Layer w8: U3.1 100.98,3490 95.08,3490 17,3411.92 17,1248 355,910 1005,910 1299.11,1204.11 ; P4.14 1270,68.29 1299.11,97.4 1299.11,1204.11 ; U2.31 1299.11,1457.93 1299.11,1204.11
PA11: P4.13 U2.32 | length 1414.6
  Top Layer w8: U2.32 1319.53,115.47 P4.13
PA12: P4.12 U2.33 | length 1447.8
  Top Layer w8: U2.33 1339.94,1457.93 1339.94,1432.6 1340.99,1431.55 1340.99,194.01 P4.12
PA15: P4.11 U2.38 | length 1636.2
  Top Layer w8: U2.38 1457.07,1535.69 1485.34,1535.69 1665,1356.03 v1(1665,1160) v1@1665,1150
  Bottom Layer w8: P4.11 1570,79.88 1555,94.88 1555,1050 v1(1665,1160)
PB0: P3.13 U2.18 | length 2716.1
  Top Layer w8: v1(862.69,1557.31) 913.17,1607.79 1065.39,1607.79 1090.66,1633.06 1096.55,1633.06 1097.6,1634.11 1122.93,1634.11 U2.18
  Bottom Layer w8: v1(862.69,1557.31) 862.69,3142.69 P3.13
PB1: P3.14 U2.19 | length 2772.6
  Top Layer w8: v1(830,1515) 859.62,1515 887.25,1542.62 887.62,1542.62 936.79,1591.79 1072.02,1591.79 1094.66,1614.43 1122.93,1614.43 U2.19
  Bottom Layer w8: v1(830,1515) 830,3210 P3.14
PB3: P4.10 U2.39 | length 1669.2
  Top Layer w8: U2.39 1457.07,1555.37 1488.28,1555.37 1715,1328.66 v1(1715,1160) v1@1715,1155
  Bottom Layer w8: P4.10 1635,100 1635,1080 v1(1715,1160)
PB4: P4.9 U2.40 | length 1718.7
  Top Layer w8: U2.40 1457.07,1575.06 1491.23,1575.06 1765,1301.29 v1(1765,1160)
  Bottom Layer w8: v1(1765,1160) 1695,1090 1695,140 P4.9
PB5: P4.8 U2.41 | length 1773.7
  Top Layer w8: U2.41 1494.27,1595.47 1820,1269.75 v1(1820,1160)
  Bottom Layer w8: v1(1820,1160) 1760,1100 1760,175 P4.8
PB6: P4.7 U2.42 | length 1836.6
  Top Layer w8: U2.42 1497.22,1615.16 1870,1242.37 v1(1870,1160)
  Bottom Layer w8: v1(1870,1160) 1810,1100 1810,225 P4.7
PB7: P4.6 R12.2 U2.43 U4.15 U5.5 | length 3421.1
  Top Layer w8: U2.43 1457.07,1634.11 1500.89,1634.11 1804.94,1330.06 1937.43,1330.06 1954.09,1313.39 R12.2@1960,1313.39 ; U4.15 2045,1750 1960,1665 R12.2 1965.96,1328.39 1982.57,1345 1982.57,1328.39 v1(2135,1328.39) 2411.91,1328.39 2625.55,1542.03 U5.5
  Bottom Layer w8: P4.6 2305,300 2305,1158.39 v1(2135,1328.39)
PB8: P4.5 R13.2 U2.45 U4.16 U5.6 | length 4160.4
  Top Layer w8: U2.45 1457.07,1673.48 1482.4,1673.48 1483.45,1672.43 1486.39,1672.43 1518.83,1640 1680.31,1640 1685,1644.69 1685,1810 1765,1890 1935,1890 2005,1960 R13.2 2140,2136.61 2150,2126.61 v1(2150,2050) ; U4.16 2150,1802.99 v1(2150,2050) ; U4.16@2150,1800 2172.6,1800 2295,1677.6 v1(2295,1405) ; U5.6 2577.97,1592.03 2540,1630 2540,1875 2365,2050 v1(2150,2050)
  Bottom Layer w8: P4.5 2330,225 2330,1370 v1(2295,1405)
PB9: P4.4 U2.46 | length 2644.2
  Top Layer w8: v1(1367.72,1544.85) 1367.72,1666.02 1395.6,1693.9 U2.46
  Bottom Layer w8: v1(1367.72,1544.85) 1789.61,1544.85 1801.74,1532.72 2217.28,1532.72 2365,1385 2365,160 P4.4
PB10: P3.15 U2.21 | length 2809.1
  Top Layer w8: v1(805,1475) 842.25,1475 893.87,1526.62 894.25,1526.62 943.41,1575.79 U2.21
  Bottom Layer w8: v1(805,1475) 802.25,1477.75 802.25,3282.25 P3.15
PB11: P3.16 U2.22 | length 2851.5
  Top Layer w8: v1(780,1435) 825,1435 862.75,1472.75 862.75,1472.87 900.5,1510.62 900.88,1510.62 946.36,1556.1 U2.22
  Bottom Layer w8: v1(780,1435) 777.25,1437.75 777.25,3357.25 P3.16
PB12: P4.20 P5.2 U2.25 | length 1977.5
  Top Layer w8: v1(655,1210) 839.56,1210 1069.58,1440.02 1179.97,1440.02 1181.73,1441.78 U2.25
  Bottom Layer w8: P5.2 611.62,73.38 P4.20@661.62,73.38 ; v1(655,1210) 659.5,1205.5 659.5,75.5 P4.20@661.62,73.38 ; P4.20 P4.20@661.62,73.38
PB13: P4.19 P7.2 U2.26 | length 2354.3
  Top Layer w8: P7.2 338.5,213.5 698.88,213.5 770,142.37 P4.19 ; v1(710,1165) 835,1165 1088.12,1418.12 1189.15,1418.12 1199.64,1428.61 1199.64,1431.55 1200.69,1432.6 1200.69,1457.93 U2.26
  Bottom Layer w8: v1(710,1165) 710,125 P4.19
PB14: P4.18 P8.2 U2.27 | length 2769.1
  Top Layer w8: v1(147.92,325) 610,325 P4.18 ; v1(775,1130) 872.88,1130 1145,1402.12 1195.78,1402.12 1219.32,1425.66 1219.32,1431.55 1220.37,1432.6 1220.37,1457.93 U2.27
  Bottom Layer w8: P8.2 125,170 147.92,192.92 v1(147.92,325) ; v1(775,1130) 775,160 P4.18
PB15: P4.17 P9.2 U2.28 | length 2704
  Top Layer w8: P9.2 399,341 655.51,341 926.5,70.01 964.99,70.01 P4.17 ; v1(825,1090) 906.29,1090 1240.06,1423.77 1240.06,1457.93 U2.28
  Bottom Layer w8: v1(825,1090) 825,210 P4.17
PC13: D3.2 P3.2 U2.2 | length 2648.2
  Top Layer w8: U2.2 1379.31,1792.07 1379.31,1820.34 1603.97,2045 1796.42,2045 v1@1830.91,2079.5 ; v1(1820,2075) 1824.5,2079.5 v1@1830.91,2079.5 ; D3.2 1888.03,2136.61 v1@1830.91,2079.5
  Bottom Layer w8: v1(1820,2075) 1820,3000 P3.2
PC14: 3.2 C21.1 P3.3 U2.3 | length 2632.7
  Top Layer w8: U2.3 1359.15,1791.59 1359.15,1831.88 v1(1613.63,2086.37) 1659.21,2131.94 3.2 1718.66,2180 1759.09,2139.57 C21.1
  Bottom Layer w8: v1(1613.63,2086.37) 1780,2252.73 1780,3060 P3.3
PC15: 3.1 C23.1 P3.4 U2.4 | length 2660.2
  Top Layer w8: U2.4 1339.21,1879.21 v1(1500,2040) 1570,2109.99 1570,2170.79 3.1 1560.79,2170.69 1545.1,2155 1475.43,2155 C23.1
  Bottom Layer w8: v1(1500,2040) 1750,2289.99 1750,3130 P3.4
RESET: C14.1 R6.2 SW1.B1 SW1.B2 U2.7 | length 1374
  Top Layer w8: SW1.B1 SW1.B2 866.5,2416.5 912.72,2462.72 C14.1 R6.2 1061.61,2333.39 1180,2215 1180,2135 1310,2005 1310,1954.45 1280.16,1924.6 U2.7
SWCLK: P2.2 U2.37 | length 1081.2
  Top Layer w8: U2.37 1456.34,1418.66 1555,1320 1555,1200 1661.1,1093.9 1811.1,1093.9 2085.54,819.46 2100.54,819.46 P2.2
SWDIO: P2.3 U2.34 | length 1287
  Top Layer w8: U2.34 1358.9,971.1 1615,715 1925,715 P2.3
VBAT: P3.1 U2.1 | length 2610.6
  Top Layer w8: U2.1 1398.27,1808.22 1400.03,1809.98 1424.98,1809.98 1610,1995 v1(1835,1995)
  Bottom Layer w8: v1(1835,1995) 1839.5,1999.5 1839.5,2019.5 1850,2030 1850,2930 P3.1
VCC: C4.2 C5.2 C6.2 CON1.1 J1.1 R2.2 R14.2 U.2 | length 2496
  Top Layer w20: R14.2 2790,2855 3141.54,3206.54 J1.1@3141.54,3403 ; J1.1@3141.54,3603 J1.1@3141.54,3403 ; C4.2 C5.2 ; U.2 3445,2962.48 3393.39,3014.09 R2.2 C6.2 C5.2 ; J1.1@3141.54,3403 3239.54,3305 3379.7,3305 3391.42,3316.72 3391.42,3319.17 3431.03,3358.78 CON1.1 3470,3225.47 3509.57,3185.91 C5.2
VCC3V3: C12.1 C13.2 C15.1 C16.2 C17.2 C18.2 C19.2 D2.1 D3.1 P1.1 P1.2 P2.4 P3.18 P4.1 P5.1 P6.8 P7.1 P8.1 P9.1 P10.1 R6.1 R12.1 R13.1 U1.2 U1.4 U2.9 U2.24 U2.36 U2.48 U3.12 U4.2 U5.8 | length 13175.1
  Top Layer w8: U3.12 115.59,2855 v1(205,2855) ; v1(640,2250) 646.61,2256.61 R6.1 1005,2165.47 1189.57,1980.91 C19.2 1191.84,1972.73 1191.84,1938.16 1240.79,1889.21 U2.9 1241.52,1790.61 1241.52,1738.48 1266.45,1713.55 ; P6.8 829.96,1305 919.96,1395 980,1395 1101.73,1516.73 U2.24 v1(1263.27,1516.73) 1266.45,1519.91 1266.45,1713.55 ; v1@1269.25,1517.11 1368.1,1517.11 1397.54,1487.67 1397.54,1459.39 U2.36 1430,1426.93 1430,1375 1475.43,1329.57 1475.43,1249.57 v1(1510,1215) ; 1456.34,1751.34 U2.48 1455.61,1732.54 1430.28,1732.54 1429.23,1731.49 1383.86,1731.49 1365.93,1713.55 1266.45,1713.55 ; 1530.43,1825.43 1540,1825.43
  Top Layer w15: 1456.34,1751.34 1530.43,1825.43
  Top Layer w20: 1540,1825.43 C17.2 ; C17.2@1561.77,1832.8 1667.8,1832.8 v1(1670,1835) ; U4.2 v1(1850,1750) ; D3.1 1945,2213.39 ; v1(1945,1970) 1945,2213.39 ; R12.1 R12.1@1965.91,1251.61 ; v1(1980,975) 1982.2,972.8 2030.94,972.8 C15.1@2044.57,959.18 ; v1(2021.61,1251.61) R12.1@1965.91,1251.61 ; C15.1 C15.1@2044.57,959.18 ; v1(2325,2250) 2191.59,2250 2154.98,2213.39 R13.1 1945,2213.39 ; v1(2530,1000) 2460,1070 2044.57,1070 ; U5.8 2642.28,1910.1 2445,2107.38 P1.2 P1.1 2445,2468.94 2642.68,2666.61 D2.1 2786.02,2665.59 2938.98,2665.59 C13.2 2940,2590.47 2825.79,2476.26 2825.79,2475.28 C12.1@2790.51,2440 ; C12.1 C12.1@2790.51,2440 ; U1.2 U1.4 2865,2195 2865,2365.51 C12.1@2790.51,2440 ; R12.1@1965.91,1251.61 1976.57,1240.94 1976.57,1235.04 2044.57,1167.05 2044.57,1070 ; C15.1@2044.57,959.18 2044.57,1070
  Bottom Layer w8: v1(640,2250) 205,2685 v1(205,2855) 205,2985 P3.18
  Bottom Layer w20: P8.1@70,70 v1(182.5,70) ; P5.1 P7.1 v1(182.5,70) ; P6.8 640,1305 255,920 P10.1 P9.1 182.5,512.5 v1(182.5,70) ; v1(1510,1215) 1546.61,1251.61 v1(2021.61,1251.61) ; v1(1670,1835) 1765,1835 v1(1850,1750) 1850,1875 v1(1945,1970) ; P2.4 1915,900 1980,965 v1(1980,975) ; v1(2325,2250) 2410,2250 2445,2285 P1.2 ; v1(2530,1000) 2530,996.89 2548.5,978.39 2548.5,86.5 P4.1
pads on no net: U3.3 U3.4 U3.5 U3.6 U3.7 U3.8 U3.9 U3.10 U3.11 U3.14 U3.15 U3.16 U3.17 U3.18 U3.19 U3.20 U3.23 U3.24 U3.25 U3.26 U3.27 U3.28 U3.29 U3.30 U3.33 U3.34 U4.1 U4.3 U4.4 U6.5 U6.6 U6.7

## Polygon pours and split planes (outlines as drawn)
NetC3_1 on Top Layer "NONET_L-01_P-001" (solid, remove dead copper, pour order 10): 3495,2670 3497.74,2667.26 3694.52,2667.26 3694.52,2385 3500.09,2385
GND on Top Layer "GND_L01_P008" (solid, remove dead copper, pour order 8): 0,0 0,3820 92.86,3820 92.86,3545 632.86,3545 632.86,3820 3930.36,3820 3930.36,0
VCC3V3 on Top Layer "NONET_L-01_P-001" (solid, remove dead copper, pour order 7): 2750,2480 2750,2220 2760,2210 2950,2210 2900,2260 2900,2490
VCC3V3 on Top Layer "NONET_L-01_P-001" (solid, remove dead copper, pour order 6): 2925,1900 2945,1920 2945,2215 2825,2215 2840,2200 2840,1900
5V on Top Layer "NONET_L-01_P-001" (solid, remove dead copper, pour order 2): 3562.09,2225.62 3562.71,2225 3820,2225 3820,1980 3810,1970 3470,1970 3470,2005
VCC on Top Layer "NONET_L-01_P-001" (solid, remove dead copper, pour order 1): 3370,3205 3375,3200 3375,3000 3525,3000 3535,2990 3545,3000 3545,3220
VCC on Top Layer "NONET_L-01_P-001" (solid, pour order 0): 3355,3350 3365,3340 3365,3170 3525,3170 3535,3160 3550,3175 3550,3355
GND on Bottom Layer "GND_L02_P009" (solid, remove dead copper, pour order 9): 0,0 0,3820 92.86,3820 92.86,3545 632.86,3545 632.86,3820 3930.36,3820 3930.36,0

## Keep-outs
Keep-Out Layer:
  the board outline again, w10

## Silkscreen, mask and mechanical layers (free items; w line width, h text height)
Top Overlay:
  text "5V" at 1067.01,3578.95 h50 r90
  text "PB1" at 1367.49,3572.85 h50 r90
  text "PA1" at 2167.49,3572.85 h50 r90
  text "3V3" at 967.06,3572.01 h50 r90
  text "PB0" at 1467.06,3571.02 h50 r90
  text "PA7" at 1555.43,3571 h50 r90
  text "PA6" at 1659.83,3571 h50 r90
  text "PA5" at 1767.01,3570.93 h50 r90
  text "PA4" at 1867.45,3571.04 h50 r90
  text "PA3" at 1967.06,3571 h50 r90
  text "PA2" at 2067.49,3571.09 h50 r90
  text "PA0" at 2267.06,3571.02 h50 r90
  text "GND" at 767.18,3566.33 h50 r90
  text "GND" at 867.18,3566.33 h50 r90
  text "PB11" at 1167.49,3565.4 h50 r90
  text "PB10" at 1267.06,3563.57 h50 r90
  text "PC15" at 2367.18,3562.74 h50 r90
  text "PC14" at 2467.23,3562.85 h50 r90
  text "PC13" at 2567.18,3562.81 h50 r90
  text "VBAT" at 2667.45,3560 h50 r90
  text "BUSY" at 515,1995.6 h50
  text "RST" at 550,1895.6 h50
  text "DC" at 560,1795.55 h50
  text "SPI_CS" at 470,1693.82 h50
  text "SPI_SCK" at 440,1598.82 h50
  text "SPI_MOSI" at 425,1498.82 h50
  text "GND" at 535,1390.6 h50
  text "3V3" at 555,1285.6 h50
  text "STOP ALARM" at 345,835.6 h50
  text "3V3" at 1924.19,600 h50 r90
  text "GND" at 2224.32,585 h50 r90
  text "SWDIO" at 2025,575 h50 r90
  text "SWCLK" at 2125,570 h50 r90
  text "MENU MODE" at 355,555.6 h50
  text "5V" at 2377.01,150.3 h50 r90
  text "3V3" at 2577.06,143.37 h50 r90
  text "PA8" at 1079.83,142.34 h50 r90
  text "PA9" at 1177.06,142.34 h50 r90
  text "PB3" at 1677.06,142.35 h50 r90
  text "PB4" at 1777.45,142.4 h50 r90
  text "PB5" at 1879.83,142.29 h50 r90
  text "PB6" at 1977.06,142.35 h50 r90
  text "PB7" at 2077.45,142.35 h50 r90
  text "PB8" at 2177.06,142.34 h50 r90
  text "PB9" at 2277.06,142.34 h50 r90
  text "GND" at 2477.18,137.69 h50 r90
  text "PA11" at 1377.49,136.76 h50 r90
  text "UP" at 229.4,135 h50 r90
  text "PB12" at 677.49,135 h50 r90
  text "PB13" at 777.06,134.9 h50 r90
  text "PB14" at 877.49,134.94 h50 r90
  text "PB15" at 977.06,134.83 h50 r90
  text "PA10" at 1277.06,134.93 h50 r90
  text "PA12" at 1477.49,135 h50 r90
  text "PA15" at 1577.06,134.83 h50 r90
  text "DOWN" at 439.4,105 h50 r90
  text "ENTER" at 160,95 h50 r90

## Text inside footprints (layer, text, board x,y; h text height)
BT1: Top 3D Body "ZONE FOR ADHESIVE FIXATION" at 3002.64,138.59 h39.37
P3: Top Overlay "10" at 1779.8,3668.07 h40 r180; Top Overlay "1" at 2659.72,3668.07 h40 r180; Top Overlay "20" at 700,3665 h40 r180
P4: Top Overlay "10" at 1694.8,-1.93 h40 r180; Top Overlay "1" at 2574.72,-1.93 h40 r180; Top Overlay "20" at 694.8,-1.93 h40 r180
P6: Top Overlay "8" at 761.93,1319.96 h40 r270; Top Overlay "1" at 761.93,2009.72 h40 r270